# Altium PCB PCB-Lift_2022-01-25.pcbdoc (part 1 of 2)
Units mil, origin at the board's own origin, x right, y up, seen from the top; angles counter-clockwise.
Board outline 4947.01 x 4952.29 mil, 2 copper layers (Top Layer, Bottom Layer); 137 components, 143 nets, 538 pads, 141 vias.
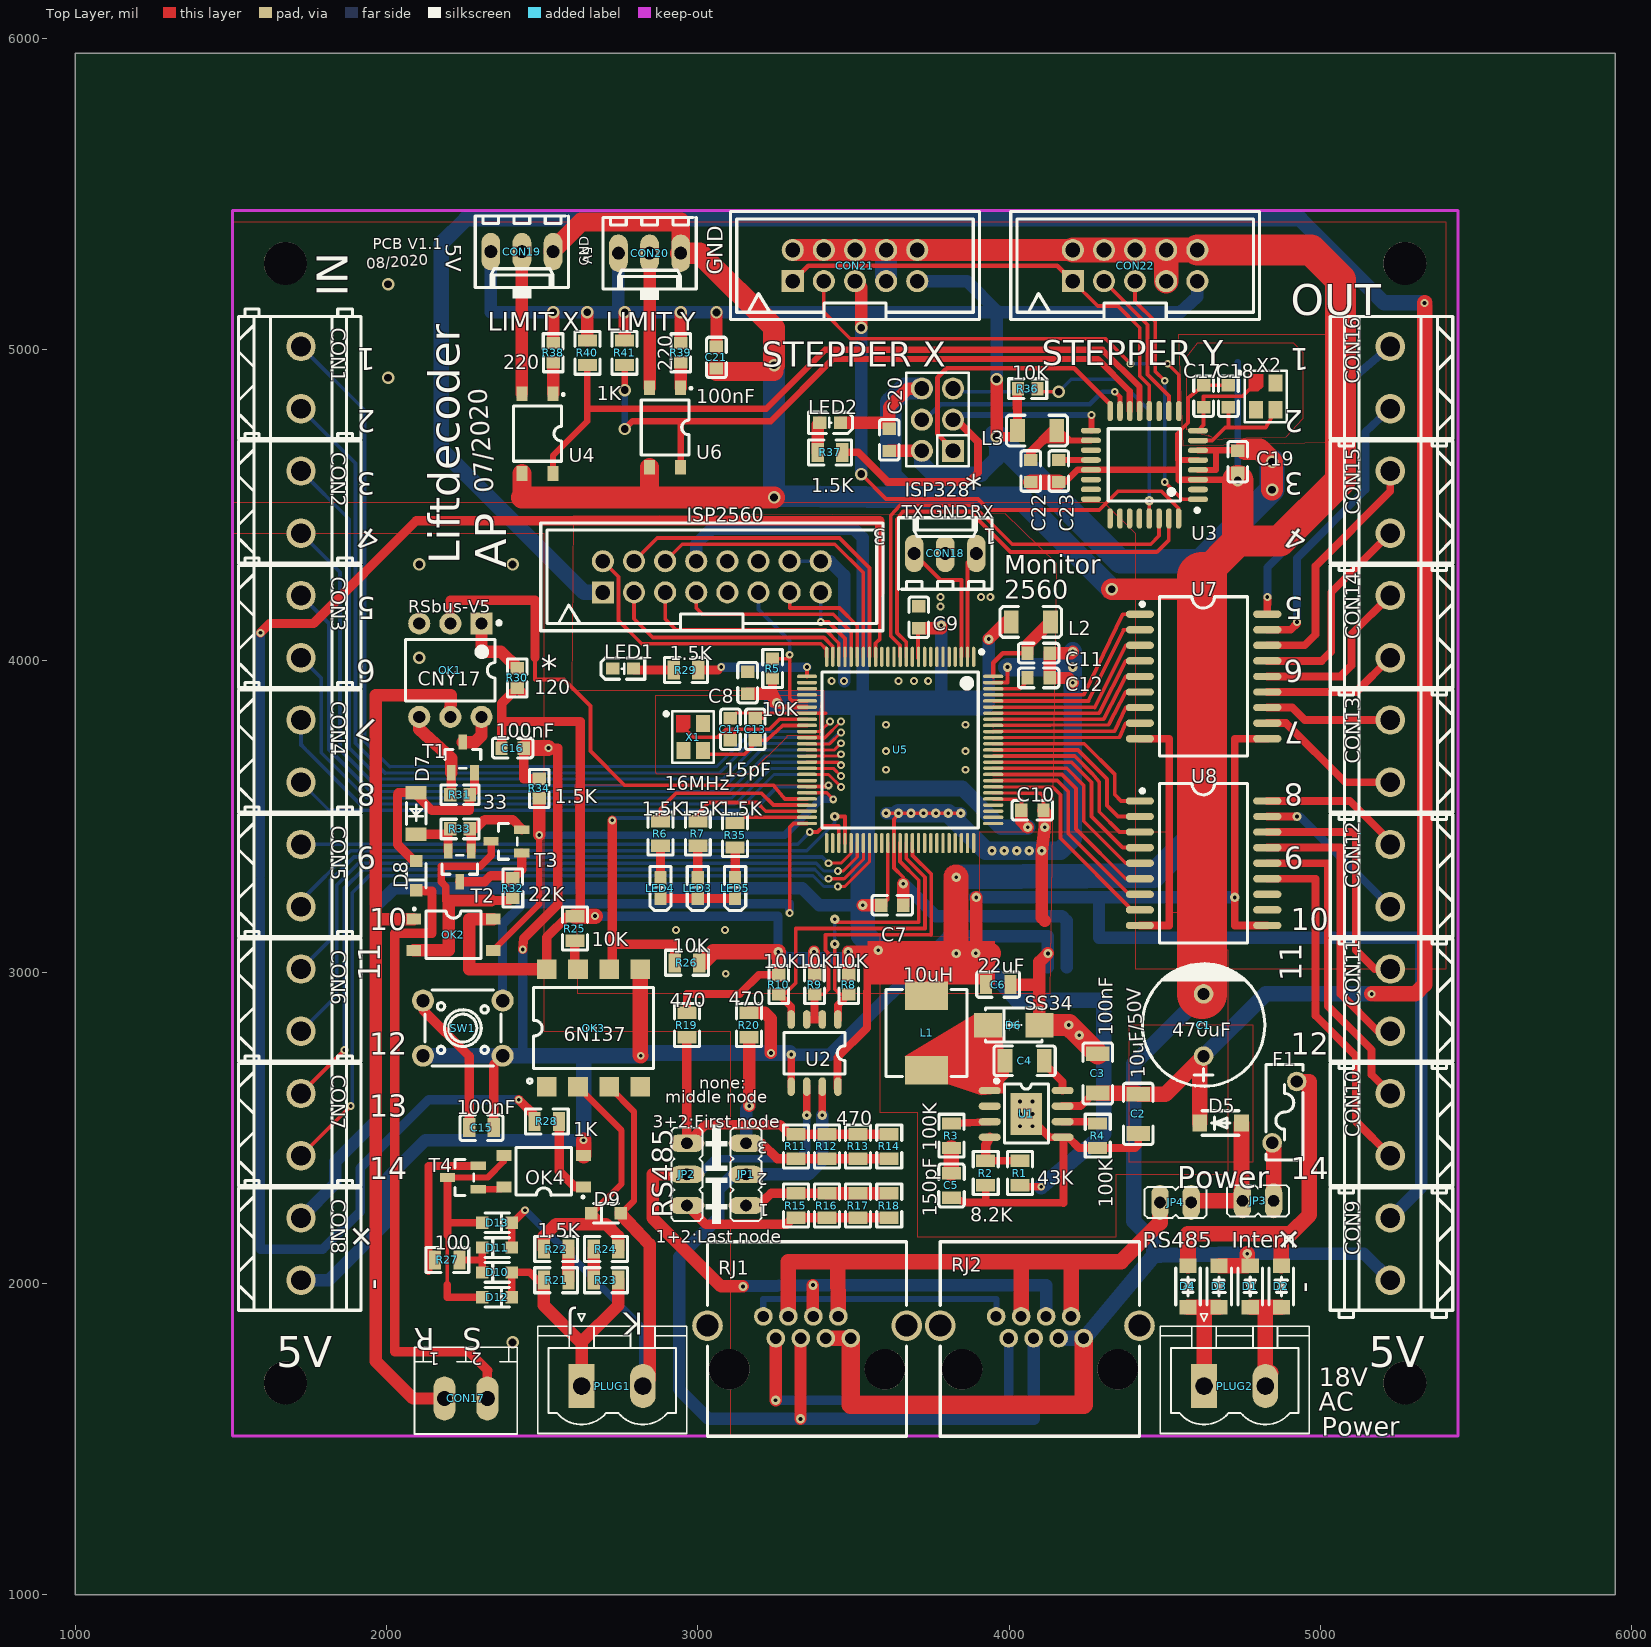
[diagram p0: Top Layer view]
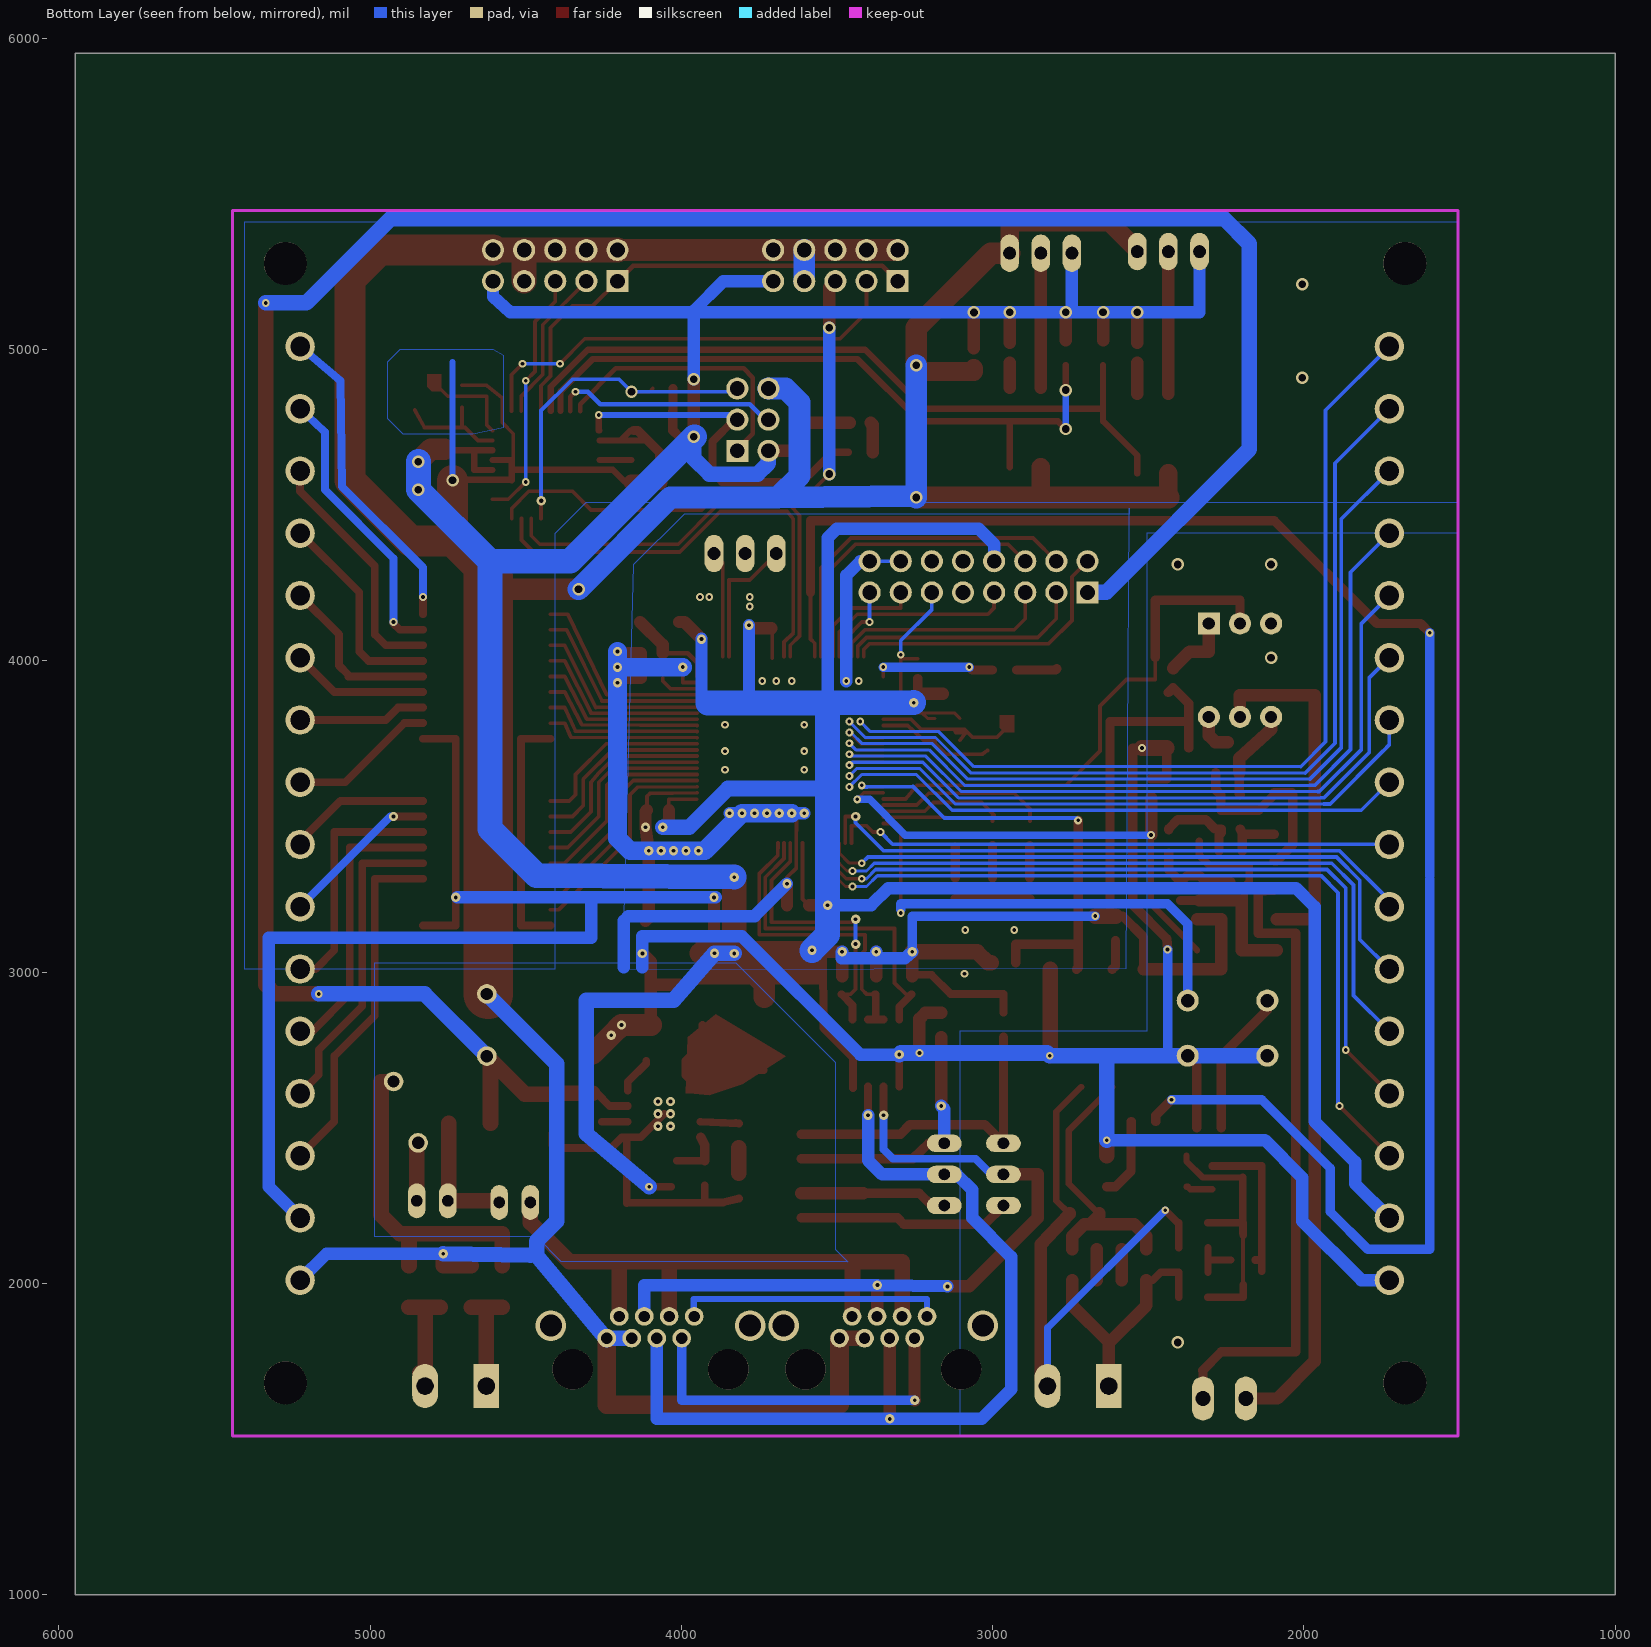
[diagram p1: Bottom Layer view, seen from below]

## Layer stack, top to bottom
Top Layer: signal copper (thickness not stored)
Dielectric: dielectric 12.6, FR-4, Dk 4.8
Bottom Layer: signal copper (thickness not stored)

## Board outline
5947.01,1000 1000,1000 1000,5952.29 5947.01,5952.29

## Components (designator, comment, footprint, x,y, rotation, side; value= is the part's Value field where it differs from the comment)
C1 "470uF" CAP-TH_BD10.0-P5.00-D1.0-FD 4625,2830.28 r90 top
C2 "10uF/50V" C1206 4414.99,2544.68 r90 top
C3 "100nF" C1206 4285,2674.65 r90 top
C4 "100nF" C1206 4050,2715.28 r0 top
C5 "150pF" C0805 3815,2314.65 r90 top
C6 "22uF" C0805 3965,2960.28 r180 top
C7 "100nF" C0603 3625,3215.28 r180 top
C8 "100nF" C0603 3160,3930.28 r270 top
C9 "100nF" C0603 3710,4140.28 r270 top
C10 "100nF" C0603 4075,3520.28 r180 top
C11 "100nF" C0603 4095,4025.28 r180 top
C12 "100nF" C0603 4095,3945.28 r180 top
C13 "15pF" C0603 3185,3780.28 r270 top
C14 "15pF" C0603 3105,3780.28 r270 top
C15 "100nF" C0805 2305,2500.28 r180 top
C16 "100nF" C0603 2405,3720.28 r0 top
C17 "15pF" C0603 4625,4850.28 r270 top
C18 "15pF" C0603 4705,4850.28 r270 top
C19 "100nF" C0603 4735,4640.28 r90 top
C20 "100nF" C0603 3615,4710.28 r270 top
C21 "100nF" C0603 3060,4975.28 r90 top
C22 "100nF" C0603 4070,4610.28 r90 top
C23 "100nF" C0603 4160,4610.28 r90 top
CON1 "DB128L-5.08-2P" CONN-TH_2P-P5.08_DB128L-5.08-2P 1725,4910.28 r270 top
CON2 "DB128L-5.08-2P" CONN-TH_2P-P5.08_DB128L-5.08-2P 1725,4510.28 r270 top
CON3 "DB128L-5.08-2P" CONN-TH_2P-P5.08_DB128L-5.08-2P 1725,4110.28 r270 top
CON4 "DB128L-5.08-2P" CONN-TH_2P-P5.08_DB128L-5.08-2P 1725,3710.28 r270 top
CON5 "DB128L-5.08-2P" CONN-TH_2P-P5.08_DB128L-5.08-2P 1725,3310.28 r270 top
CON6 "DB128L-5.08-2P" CONN-TH_2P-P5.08_DB128L-5.08-2P 1725,2910.28 r270 top
CON7 "DB128L-5.08-2P" CONN-TH_2P-P5.08_DB128L-5.08-2P 1725,2510.28 r270 top
CON8 "DB128L-5.08-2P" CONN-TH_2P-P5.08_DB128L-5.08-2P 1725,2110.28 r270 top
CON9 "DB128L-5.08-2P" CONN-TH_2P-P5.08_DB128L-5.08-2P 5225,2110.28 r90 top
CON10 "DB128L-5.08-2P" CONN-TH_2P-P5.08_DB128L-5.08-2P 5225,2510.28 r90 top
CON11 "DB128L-5.08-2P" CONN-TH_2P-P5.08_DB128L-5.08-2P 5225,2910.28 r90 top
CON12 "DB128L-5.08-2P" CONN-TH_2P-P5.08_DB128L-5.08-2P 5225,3310.28 r90 top
CON13 "DB128L-5.08-2P" CONN-TH_2P-P5.08_DB128L-5.08-2P 5225,3710.28 r90 top
CON14 "DB128L-5.08-2P" CONN-TH_2P-P5.08_DB128L-5.08-2P 5225,4110.28 r90 top
CON15 "DB128L-5.08-2P" CONN-TH_2P-P5.08_DB128L-5.08-2P 5225,4510.28 r90 top
CON16 "DB128L-5.08-2P" CONN-TH_2P-P5.08_DB128L-5.08-2P 5225,4910.28 r90 top
CON17 "RS-bus connector" STL-1550-2-V 2255,1630.28 r0 top
CON18 "2510S-3P" MOLEX-3P 3795,4345.28 r0 top
CON19 "2510S-3P" MOLEX-3P 2435,5315.28 r180 top
CON20 "2510S-3P" MOLEX-3P 2845,5310.28 r180 top
CON21 "300S-10P" IDC-TH_300S-10P 3505,5270.28 r0 top
CON22 "300S-10P" IDC-TH_300S-10P 4405,5270.28 r0 top
D1 "4007" SOD-123F_L2.8-W1.8-LS3.7-RD 4775,1990.28 r90 top
D2 "4007" SOD-123F_L2.8-W1.8-LS3.7-RD 4875,1990.28 r270 top
D3 "4007" SOD-123F_L2.8-W1.8-LS3.7-RD 4675,1990.28 r90 top
D4 "4007" SOD-123F_L2.8-W1.8-LS3.7-RD 4575,1990.28 r270 top
D5 "4007" SOD-123F_L2.8-W1.8-LS3.7-RD 4680,2515.28 r0 top
D6 "SS34" DO-214AC_SS34_PAD_DISTANCE_UPDATED 4015,2830.28 r0 top
D7 "ZMM5V6" LL-34_L3.5-W1.5-RD 2095,3510.28 r90 top
D8 "1N4148" SOD-323_L1.8-W1.3-LS2.5-RD 2095,3310.28 r90 top
D9 "1N4148" SOD-323_L1.8-W1.3-LS2.5-RD 2705,2225.28 r0 top
D10 "1N4148" SOD-323_L1.8-W1.3-LS2.5-RD 2355,2035.28 r0 top
D11 "1N4148" SOD-323_L1.8-W1.3-LS2.5-RD 2355,2115.28 r0 top
D12 "1N4148" SOD-323_L1.8-W1.3-LS2.5-RD 2355,1955.28 r180 top
D13 "1N4148" SOD-323_L1.8-W1.3-LS2.5-RD 2355,2195.28 r180 top
F1 "Resettable fuse" FUSE-TH_L7.8-W3.0-P5.10-D0.5-S2.00 4885,2550.28 r90 top
ISP328 "2560" HDR-TH_6P-P2.54-V-R2-C3-S2.54 3770,4775.28 r90 top
ISP2560 "300S-16P" IDC-TH_300S-16P 3045,4270.28 r0 top
JP1 "JP2E" JP2 3155,2350.28 r90 top
JP2 "JP2E" JP2 2965,2350.28 r90 top
JP3 "JP1E" JP1 4800,2265.28 r90 top
JP4 "JP1E" JP1 4535,2260.28 r90 top
L1 "10uH" IND-SMD_L7.1-W6.6 3735,2804.65 r90 top
L2 "10uH" L1206 4070,4125.28 r180 top
L3 "10uH" L1206 4090,4740.28 r180 top
LED1 "KT-0603R" LED0603-R-RD 2760,3975.28 r0 top
LED2 "KT-0603R" LED0603-R-RD 3425,4765.28 r180 top
LED3 "19-217/GHC-YR1S2/3T" LED0603-R-RD 3000,3270.28 r90 top
LED4 "19-217/BHC-ZL1M2RY/3T" LED0603-R-RD 2880,3270.28 r90 top
LED5 "19-213/Y2C-CQ2R2L/3T(CY)" LED0603-R-RD 3120,3270.28 r90 top
OK1 "CNY17" DIP-6_L7.3-W6.5-P2.54-LS7.6-BL 2205,3970.28 r180 top
OK2 "EL357N(C)" SOP-4_L3.9-W4.4-P2.54-LS7.0-TL 2215,3120.28 r0 top
OK3 "6N137" SMD-8_L9.8-W6.6-P2.54-LS10.3-BL 2665,2820.28 r0 top
OK4 "EL357N(C)" SOP-4_L3.9-W4.4-P2.54-LS7.0-TL 2505,2360.28 r180 top
PLUG1 "CON_2P_5MM-VERTICAL" "PHOENIX MSTBVA 2,5/2-G" 2725,1670.28 r0 top
PLUG2 "CON_2P_5MM-VERTICAL" "PHOENIX MSTBVA 2,5/2-G" 4725,1670.28 r0 top
R1 "43K" R0805 4035,2354.65 r270 top
R2 "8.2K" R0805 3925,2354.65 r90 top
R3 "100K" R0805 3815,2474.65 r90 top
R4 "100K" R0805 4285,2474.65 r270 top
R5 "10K" R0603 3240,3975.28 r270 top
R6 "1.5K" R0805 2880,3445.28 r90 top
R7 "1.5K" R0805 3000,3445.28 r90 top
R8 "10K" R0603 3485,2960.28 r90 top
R9 "10K" R0603 3375,2960.28 r90 top
R10 "10K" R0603 3260,2960.28 r90 top
R11 "470" R0805 3315,2440.28 r90 top
R12 "470" R0805 3415,2440.28 r90 top
R13 "470" R0805 3515,2440.28 r90 top
R14 "470" R0805 3615,2440.28 r90 top
R15 "470" R0805 3315,2250.28 r270 top
R16 "470" R0805 3415,2250.28 r270 top
R17 "470" R0805 3515,2250.28 r270 top
R18 "470" R0805 3615,2250.28 r270 top
R19 "470" R0805 2965,2830.28 r90 top
R20 "470" R0805 3165,2830.28 r270 top
R21 "1.5K" R0805 2545,2010.28 r0 top
R22 "1.5K" R0805 2545,2110.28 r180 top
R23 "1.5K" R0805 2705,2010.28 r180 top
R24 "1.5K" R0805 2705,2110.28 r0 top
R25 "10K" R0805 2605,3140.28 r90 top
R26 "10K" R0805 2965,3030.28 r0 top
R27 "100" R0805 2195,2075.28 r180 top
R28 "1K" R0805 2515,2520.28 r180 top
R29 "1.5K" R0805 2961.69,3970.91 r0 top
R30 "120" R0603 2420,3945.28 r90 top
R31 "33" R0603 2235.8,3570.28 r0 top
R32 "22K" R0603 2405.8,3270.28 r270 top
R33 "220" R0603 2235.8,3460.28 r180 top
R34 "1.5K" R0603 2490.8,3590.29 r90 top
R35 "1.5K" R0805 3120,3440.28 r90 top
R36 "10K" R0603 4060,4875.28 r180 top
R37 "1.5K" R0805 3425,4670.28 r0 top
R38 "220" R0603 2535,4990.28 r270 top
R39 "220" R0603 2945,4990.28 r270 top
R40 "1K" R0805 2645,4990.28 r270 top
R41 "1K" R0805 2765,4990.28 r270 top
RJ1 "R-RJ45R08P-B000" RJ45-TH_R-RJ45R08P-B000 3351.06,1858.98 r0 top
RJ2 "R-RJ45R08P-B000" RJ45-TH_R-RJ45R08P-B000 4099.1,1858.98 r0 top
SW1 "B3F-1000" KEY-TH_4P-L6.2-W6.2-P4.50-LS6.5 2245,2820.28 r180 top
T1 "MMBT5551" SOT-23-3_L2.9-W1.3-P1.90-LS2.4-BR 2245,3690.28 r270 top
T2 "MMBT5551" SOT-23-3_L2.9-W1.3-P1.90-LS2.4-BR 2235,3340.28 r90 top
T3 "MMBT5551" SOT-23-3_L2.9-W1.3-P1.90-LS2.4-BR 2385,3420.28 r0 top
T4 "MMBT5401" SOT-23-3_L2.9-W1.3-P1.90-LS2.4-BR 2245,2340.28 r0 top
U1 "MP1584" SOIC-8_L5.0-W4.0-P1.27-LS6.0-BL-EP 4055,2544.65 r270 top
U2 "SP485EEN-L/TR" SOIC-8_L5.0-W4.0-P1.27-LS6.0-BL 3375,2740.28 r180 top
U3 "ATMEGA328P-AU" TQFP-32_L7.0-W7.0-P0.80-LS9.0-BL 4435,4630.28 r90 top
U4 "EL357N(C)(TA)-G" SOP-4_L3.9-W4.4-P2.54-LS7.0-TL 2485,4730.28 r270 top
U5 "ATMEGA2560-16AU" TQFP-100_L14.0-W14.0-P0.50-LS16.0-BL 3650.04,3714.06 r180 top
U6 "EL357N(C)(TA)-G" SOP-4_L3.9-W4.4-P2.54-LS7.0-TL 2895,4750.28 r270 top
U7 "ULN2803ADWR" SOIC-18_L13.8-W7.5-P1.27-LS10.3-BL 4625.05,3950.23 r270 top
U8 "ULN2803ADWR" SOIC-18_L13.8-W7.5-P1.27-LS10.3-BL 4625.05,3350.23 r270 top
X1 "16MHz" OSC-SMD_4P-L3.2-W2.5-BL 2985,3755.28 r270 top
X2 "16MHz" OSC-SMD_4P-L3.2-W2.5-BL 4825,4850.28 r270 top

## Footprints (in the part's own frame and the unit in brackets; to place one, negate y for a bottom-side part, rotate by r counter-clockwise, add the part's x,y. Pads: shape width x height; smd on the part's side, far side on the other; paste and mask are expansions set on the pad)
C0603 [mm]
  rect 1x1.1 smd: 1(-0.9,0) 2(0.9,0)
  silkscreen extent -1.65,-0.8 1.65,0.8
C0805 [mm]
  rect 1x1.55 smd: 1(-1,0) 2(1,0)
  silkscreen extent -1.75,-1.04 1.75,1.04
C1206 [mm]
  rect 1.2x1.9 smd: 1(-1.6,0) 2(1.6,0)
  silkscreen extent -2.5,-1.2 2.5,1.2
CAP-TH_BD10.0-P5.00-D1.0-FD [mm]
  round 1.6 hole 1: 1(-2.54,0) 2(2.54,0)
  silkscreen extent -5,-5 5.08,4.99
CONN-TH_2P-P5.08_DB128L-5.08-2P [mm]
  round 2.4 hole 1.6: 1(-2.54,0) 2(2.54,0)
  silkscreen extent -5.59,-5.1 4.99,4.9
DIP-6_L7.3-W6.5-P2.54-LS7.6-BL [mm]
  rect 1.8x1.8 hole 1: 1(-2.54,-3.81)
  round 1.8 hole 1: 2(0,-3.81) 3(2.54,-3.81) 4(2.54,3.81) 5(0,3.81) 6(-2.54,3.81)
  silkscreen extent -4.11,-4.01 3.65,2.5
DO-214AC_SS34_PAD_DISTANCE_UPDATED [mm]
  rect 2.3x2 smd: 1(-2.1,0) 2(2.1,0)
  silkscreen extent -2.3,-1.4 2.3,1.4
FUSE-TH_L7.8-W3.0-P5.10-D0.5-S2.00 [mm]
  round 1.6 hole 1: 1(-2.5,1) 2(2.5,-1)
  silkscreen extent -3.9,-1.5 3.9,1.5
HDR-TH_6P-P2.54-V-R2-C3-S2.54 [mm]
  rect 1.8x1.8 hole 1.2: 1(-2.54,-1.27)
  round 1.8 hole 1.2: 2(-2.54,1.27) 3(0,-1.27) 4(0,1.27) 5(2.54,-1.27) 6(2.54,1.27)
  silkscreen extent -3.81,-2.54 3.81,2.54
IDC-TH_300S-10P [mm]
  rect 1.8x1.8 hole 1.2: 1(-5.08,-1.27)
  round 1.8 hole 1.2: 2(-5.08,1.27) 3(-2.54,-1.27) 4(-2.54,1.27) 5(0,-1.27) 6(0,1.27) 7(2.54,-1.27) 8(2.54,1.27) 9(5.08,-1.27) 10(5.08,1.27)
  silkscreen extent -10.15,-4.4 10.15,4.4
IDC-TH_300S-16P [mm]
  rect 1.8x1.8 hole 1.2: 1(-8.89,-1.27)
  round 1.8 hole 1.2: 2(-8.89,1.27) 3(-6.35,-1.27) 4(-6.35,1.27) 5(-3.81,-1.27) 6(-3.81,1.27) 7(-1.27,-1.27) 8(-1.27,1.27) 9(1.27,-1.27) 10(1.27,1.27) 11(3.81,-1.27) 12(3.81,1.27) 13(6.35,-1.27) 14(6.35,1.27) 15(8.89,-1.27) 16(8.89,1.27)
  silkscreen extent -13.96,-4.4 13.96,4.4
IND-SMD_L7.1-W6.6 [mm]
  rect 2.35x3.5 smd: 1(-3.035,0) 2(3.035,0)
  silkscreen extent -3.55,-3.3 3.55,3.3
JP1 [mil]
  oval 112x56 hole 36 slot 36.2 at 0 deg: 1(0,-50) 2(0,50)
  silkscreen extent -50,-100 50,100
JP2 [mil]
  oval 56x112 hole 36 slot 36.2 at 90 deg: 1(-100,0) 2(0,0) 3(100,0)
  silkscreen extent -150,-50 150,50
KEY-TH_4P-L6.2-W6.2-P4.50-LS6.5 [mm]
  round 1.8 hole 1.1: 1(-3.251,2.25) 2(3.251,2.25) 3(-3.251,-2.25) 4(3.251,-2.25)
  silkscreen extent -3.1,-3.1 3.1,3.1
L1206 [mm]
  rect 1.2x1.9 smd: 1(-1.6,0) 2(1.6,0)
  silkscreen extent -2.5,-1.25 2.5,1.25
LED0603-R-RD [mil]
  rect 43x39 smd: 1(33.5,0) 2(-33.5,0)
  silkscreen extent -72,-34 70,34
LL-34_L3.5-W1.5-RD [mm]
  rect 1.1x1.7 smd: 1(-1.7,0) 2(1.7,0)
  silkscreen extent -0.9,-0.8 0.9,0.8
MOLEX-3P [mil]
  oval 60x120 hole 40 slot 40.2 at 90 deg: 1(100,0) 2(0,0) 3(-100,0)
  silkscreen extent -150,-115 150,115
OSC-SMD_4P-L3.2-W2.5-BL [mm]
  round 0 smd: 1(-1.1,-0.8)
  rect 1.4x1.15 smd: 2(1.1,-0.8) 3(1.1,0.8) 4(-1.1,0.8)
  Top Layer region: -1.8,-0.225 -0.762,-0.225 -0.4,-0.604 -0.4,-1.375 -1.8,-1.375
  silkscreen extent -2.1,-2.35 2.1,1.7
"PHOENIX MSTBVA 2,5/2-G" [mm]
  rect 2.1x3.6 hole 1.4 slot 1.405 at 90 deg: 1(-2.5,0)
  oval 2.1x3.6 hole 1.4 slot 1.405 at 90 deg: 2(2.501,0)
  silkscreen extent -6.08,-3.88 6.08,5.9
R0603 [mm]
  rect 1x1.1 smd: 1(-0.8,0) 2(0.8,0)
  silkscreen extent -1.55,-0.8 1.55,0.81
R0805 [mm]
  rect 1x1.55 smd: 1(-1,0) 2(1,0)
  silkscreen extent -1.75,-1.02 1.75,1.02
RJ45-TH_R-RJ45R08P-B000 [mm]
  round 1.524 hole 0.914: 1(3.57,-0.89) 2(2.55,0.89) 3(1.53,-0.89) 4(0.51,0.89) 5(-0.51,-0.89) 6(-1.53,0.89) 7(-2.55,-0.89) 8(-3.57,0.89)
  round 2.5 hole 1.8: 9(-8.13,0.13) 10(8.13,0.13)
  round 3.3 hole 3.3 unplated: ""(-6.35,-3.43) ""(6.35,-3.43)
  silkscreen extent -8.13,-8.89 8.13,6.98
SMD-8_L9.8-W6.6-P2.54-LS10.3-BL [mil]
  rect 62.99x63 smd: 1(-150,-188.97) 2(-50,-188.97) 3(50,-188.97) 4(150,-188.97) 5(150,188.98) 6(50,188.98) 7(-50,188.98) 8(-150,188.98)
  silkscreen extent -212,-177 193,130
SOD-123F_L2.8-W1.8-LS3.7-RD [mm]
  rect 1.2x1.4 smd: 1(-1.7,0) 2(1.7,0)
  silkscreen extent -1.5,-1 1.5,1
SOD-323_L1.8-W1.3-LS2.5-RD [mm]
  rect 1x1 smd: 1(-1.2,0) 2(1.2,0)
  silkscreen extent -1,-0.8 1,0.8
SOIC-8_L5.0-W4.0-P1.27-LS6.0-BL [mm]
  oval 0.6x1.52 smd: 1(-1.905,-2.74) 2(-0.635,-2.74) 3(0.635,-2.74) 4(1.905,-2.74) 5(1.905,2.74) 6(0.635,2.74) 7(-0.635,2.74) 8(-1.905,2.74)
  silkscreen extent -2.49,-1.67 2.5,1.7
SOIC-8_L5.0-W4.0-P1.27-LS6.0-BL-EP [mm]
  oval 0.6x1.8 smd: 1(-1.905,-2.972) 2(-0.635,-2.972) 3(0.635,-2.972) 4(1.905,-2.972) 5(1.905,2.972) 6(0.635,2.972) 7(-0.635,2.972) 8(-1.905,2.972)
  rect 3.45x2.56 smd: 9(0,0)
  silkscreen extent -2.84,-2.56 2.39,1.83
SOIC-18_L13.8-W7.5-P1.27-LS10.3-BL [mm]
  oval 0.6x2.3 smd: 1(-5.08,-5.2) 2(-3.81,-5.2) 3(-2.54,-5.2) 4(-1.27,-5.2) 5(0,-5.2) 6(1.27,-5.2) 7(2.54,-5.2) 8(3.81,-5.2) 9(5.08,-5.2) 10(5.08,5.2) 11(3.81,5.2) 12(2.54,5.2) 13(1.27,5.2) 14(0,5.2) 15(-1.27,5.2) 16(-2.54,5.2) 17(-3.81,5.2) 18(-5.08,5.2)
  silkscreen extent -6.5,-5.15 6.5,3.6
SOP-4_L3.9-W4.4-P2.54-LS7.0-TL [mm]
  rect 1.199x0.9 smd: 1(-3.25,1.27) 2(-3.25,-1.27) 3(3.25,-1.27) 4(3.25,1.27)
  silkscreen extent -3.28,-1.95 2.25,2.18
SOT-23-3_L2.9-W1.3-P1.90-LS2.4-BR [mm]
  rect 1.25x0.7 smd: 1(1.25,-0.95) 2(1.25,0.95) 3(-1.25,0)
  silkscreen extent -0.65,-1.46 0.9,1.46
STL-1550-2-V [mil]
  oval 70.87x141.73 hole 47.24 slot 47.44 at 90 deg: 1(-68.9,0) 2(68.9,0)
  silkscreen extent -165,-114 165,165
TQFP-32_L7.0-W7.0-P0.80-LS9.0-BL [mm]
  oval 0.45x1.65 smd: 1(-2.817,-4.369) 2(-2.017,-4.369) 3(-1.217,-4.369) 4(-0.417,-4.369) 5(0.381,-4.369) 6(1.181,-4.369) 7(1.981,-4.369) 8(2.781,-4.369) 17(2.791,4.369) 18(1.991,4.369) 19(1.191,4.369) 20(0.391,4.369) 21(-0.406,4.369) 22(-1.207,4.369) 23(-2.007,4.369) 24(-2.807,4.369)
  oval 1.65x0.45 smd: 9(4.381,-2.804) 10(4.381,-2.004) 11(4.381,-1.204) 12(4.381,-0.404) 13(4.381,0.394) 14(4.381,1.194) 15(4.381,1.994) 16(4.381,2.794) 25(-4.381,2.804) 26(-4.381,2.004) 27(-4.381,1.204) 28(-4.381,0.404) 29(-4.381,-0.394) 30(-4.381,-1.194) 31(-4.381,-1.994) 32(-4.381,-2.794)
  silkscreen extent -3.86,-4.45 2.94,2.95
TQFP-100_L14.0-W14.0-P0.50-LS16.0-BL [mm]
  oval 0.28x1.65 smd: 1(-6,-7.6) 2(-5.5,-7.6) 3(-5,-7.6) 4(-4.5,-7.6) 5(-4,-7.6) 6(-3.5,-7.6) 7(-3,-7.6) 8(-2.5,-7.6) 9(-2,-7.6) 10(-1.5,-7.6) 11(-1,-7.6) 12(-0.5,-7.6) 13(0,-7.6) 14(0.5,-7.6) 15(1,-7.6) 16(1.5,-7.6) 17(2,-7.6) 18(2.5,-7.6) 19(3,-7.6) 20(3.5,-7.6) 21(4,-7.6) 22(4.5,-7.6) 23(5,-7.6) 24(5.5,-7.6) 25(6,-7.6) 51(6,7.6) 52(5.5,7.6) 53(5,7.6) 54(4.5,7.6) 55(4,7.6) 56(3.5,7.6) 57(3,7.6) 58(2.5,7.6) 59(2,7.6) 60(1.5,7.6) 61(1,7.6) 62(0.5,7.6) 63(0,7.6) 64(-0.5,7.6) 65(-1,7.6) 66(-1.5,7.6) 67(-2,7.6) 68(-2.5,7.6) 69(-3,7.6) 70(-3.5,7.6) 71(-4,7.6) 72(-4.5,7.6) 73(-5,7.6) 74(-5.5,7.6) 75(-6,7.6)
  oval 1.65x0.28 smd: 26(7.6,-6) 27(7.6,-5.5) 28(7.6,-5) 29(7.6,-4.5) 30(7.6,-4) 31(7.6,-3.5) 32(7.6,-3) 33(7.6,-2.5) 34(7.6,-2) 35(7.6,-1.5) 36(7.6,-1) 37(7.6,-0.5) 38(7.6,0) 39(7.6,0.5) 40(7.6,1) 41(7.6,1.5) 42(7.6,2) 43(7.6,2.5) 44(7.6,3) 45(7.6,3.5) 46(7.6,4) 47(7.6,4.5) 48(7.6,5) 49(7.6,5.5) 50(7.6,6) 76(-7.6,6) 77(-7.6,5.5) 78(-7.6,5) 79(-7.6,4.5) 80(-7.6,4) 81(-7.6,3.5) 82(-7.6,3) 83(-7.6,2.5) 84(-7.6,2) 85(-7.6,1.5) 86(-7.6,1) 87(-7.6,0.5) 88(-7.6,0) 89(-7.6,-0.5) 90(-7.6,-1) 91(-7.6,-1.5) 92(-7.6,-2) 93(-7.6,-2.5) 94(-7.6,-3) 95(-7.6,-3.5) 96(-7.6,-4) 97(-7.6,-4.5) 98(-7.6,-5) 99(-7.6,-5.5) 100(-7.6,-6)
  silkscreen extent -6.8,-8.15 6.37,6.37

## Free pads (board coordinates)
  round 137.8 hole 137.8 unplated: ""(1675,1680.28) ""(1675,5277.33) ""(5272.05,1680.28) ""(5272.05,5277.33)

## Via types
v1: diameter 25, hole 12, Top Layer to Bottom Layer, tented both sides, 62 vias
v2: diameter 30, hole 12, Top Layer to Bottom Layer, tented both sides, 54 vias
v3: diameter 40, hole 25, Top Layer to Bottom Layer, tented both sides, 24 vias
v4: diameter 30, hole 15, Top Layer to Bottom Layer, tented both sides, 1 vias

## Nets (pads, with @x,y where several pads share a name; then routed paths per layer and width w, separated by ;. In a path a pad name is that pad's centre, name@x,y a point inside that pad or via, vN(x,y) a via of type N, cw(c..) or ccw(c..) an arc to the next point about the centre after c; other vN are vias at no path point)
485RE/DE: R9.1 U2.2 U2.3 U5.65 | length 1024.6
  Top Layer w12: R9.1@3375,2928.79 3403.5,2928.78 3420,2945.28 3420,3060.28 3410,3070.28 3410,3120.28 3750,3120.28 3750,3315.28 3690,3375.28 U5.65@3689.41,3414.85
  Top Layer w25: U2.3@3350,2848.16 U2.2@3400,2848.16 ; 3375,2848.15 R9.1@3375,2928.79 R9.1@3378.51,2928.79
485RXD: R8.1 U2.1 U5.63 | length 931.4
  Top Layer w12: v2(3440,3090.28) 3440,2945.28 3456.49,2928.8 R8.1@3485,2928.79 ; v2(3440,3170.28) 3440,3160.28 3710,3160.28 3710,3295.28 3650,3355.28 U5.63@3650.04,3414.85
  Top Layer w25: U2.1@3450,2848.16 3450,2893.79 R8.1@3485,2928.79
  Bottom Layer w12: v2(3440,3090.28) v2(3440,3170.28)
485TXD: R10.1 U2.4 U5.64 | length 1056.9
  Top Layer w12: R10.1@3260,2928.79 3278.51,2928.79 3315,2965.28 3315,3140.28 3730,3140.28 3730,3305.28 3669.7,3365.58 U5.64@3669.72,3414.85
  Top Layer w25: R10.1@3260,2928.79 3300,2888.79 U2.4@3300,2848.16
+5V: C6.2 C7.2 C8.2 C9.2 C10.2 C16.1 C19.2 C20.2 C21.2 CON8.1 CON9.2 CON19.1 CON20.1 CON21.9 CON22.9 ISP328.2 ISP2560.8 L1.2 L2.2 L3.2 OK2.4 OK3.8 R1.2 R5.2 R8.2 R9.2 R10.2 R19.2 R25.2 R26.2 R30.1 R36.2 R38.1 R39.1 R40.1 R41.1 U2.8 U3.4 U3.6 U5.10 U5.31 U5.61 U5.80 U7.10 U8.10 | length 25759.3
  Top Layer w12: C7.2@3589.57,3215.28 3590.67,3215.28 3610.67,3235.28 U5.61@3610.67,3414.85 ; U5.10@3707.49,4008.89 3707.49,4102.33 C9.2@3710,4104.85 ; U5.80@3950,3555.28 4040,3555.28 C10.2@4039.57,3520.28
  Top Layer w15: v2(3253.39,3865.89) 3267.41,3851.87 U5.31@3350.83,3851.86
  Top Layer w20: U3.4@4607,4613.88 4665,4613.88 4665,4675.72 ; U3.6@4607,4676.78 4735,4676.78 C19.2@4735,4675.72
  Top Layer w25: R19.2@2965,2869.65 2965,2930.28 3135,2930.28 3196.5,2991.78 R10.2@3260,2991.78 ; U2.8@3448.39,2628.02 3448.39,2725.89 3543.39,2820.89 3544.56,3065.89 ; R1.2@4033.39,2310.89 v1(4103.39,2310.89) ; U8.10@4829.7,3150.28 4725,3150.28 v2(4725,3240.28) 4725,3750.28 U7.10@4829.72,3750.28
  Top Layer w30: C16.1@2369.57,3720.28 2369.6,3796.49 2369.6,3863.38 R30.1@2420,3913.79 R30.1@2435,3898.78 ; 2369.6,3805.28 2622.5,3805.28 2622.5,3179.68 R25.2@2605,3179.65 2581.9,3179.68 2515,3112.78 OK3.8@2515,3009.26 ; v2@3240,3865.89 R5.2@3240,3943.79 ; v3(3960,4720.28) 4007,4720.28 L3.2@4027.01,4740.28 R36.2@4026.5,4875.28
  Top Layer w39.37: C8.2@3160,3894.88 3240,3894.88 v2(3253.39,3865.89) ; C9.2@3710,4104.85 3782.52,4104.84 v2@3782.52,4110.58 ; v2(3935,4070.28) 3989.99,4125.27 L2.2@4007.01,4125.28
  Top Layer w40: OK2.4@2342.95,3170.28 2265,3170.28 2265,3010.28 2266.02,3009.26 OK3.8@2515,3009.26 ; R38.1@2535,5021.78 v3(2535,5120.28) ; R40.1@2645,5029.65 v3(2645,5120.28) ; R41.1@2765,5030.28 v3(2765,5120.28) ; R39.1@2945,5021.78 v3(2945,5120.28) ; C21.2@3060,5005.28 v3(3060,5119.84) ; R10.2@3258.39,2987.39 v2(3258.39,3065.89) ; R9.2@3373.39,2987.39 v2(3373.39,3065.89) ; R8.2@3483.38,2987.39 v2(3483.39,3065.89) 3830,3065.89 v2(3830,3060.28) ; v2(3530,3215.28) C7.2@3589.57,3215.28 ; C20.2@3615,4674.85 3615.44,4675.28 ISP328.2@3720,4675.28 ; v2(3893.39,3060.89) 3895,3062.51 v2(3895,3240.28) ; v3(3960,4720.28) v3(3960,4905.28) ; C10.2@4039.57,3520.28 4039.56,3485.72 v2(4060,3465.28)
  Top Layer w50: R25.2@2605,3179.65 2669.37,3179.65 v1(2670,3180.28) ; R26.2@3004.37,3030.28 3015,3030.28 3050,3065.28 v2@3258.39,3065.28
  Top Layer w70: L1.2@3733.38,2919.75 3733.38,2963.67 v2(3830,3060.28) 3830.61,3060.89 v2(3893.39,3060.89) 3938.39,3060.89 ; 4760,4680.28 4805,4680.28 v3(4845,4640.28) 4845,4592.14 v3(4845,4550.28)
  Top Layer w80: v2@3825,3060.28 v2(3830,3060.28) v2(3830,3305.28)
  Bottom Layer w30: v1(2670,3180.28) 3257.9,3180.28 v2@3257.9,3077.28
  Bottom Layer w39.37: 3782.5,3865.28 v2(3782.52,4114.51) ; 3935,3869.09 v2@3935,4071.48
  Bottom Layer w40: CON8.1@1725,2210.28 1835,2320.28 1835,2390.28 1965,2520.28 1965,3210.28 2025,3270.28 3335,3270.28 3390,3215.28 v2(3530,3215.28) ; CON19.1@2335,5315.28 2335,5120.28 3960,5120.28 4550,5120.28 4605,5170.28 CON22.9@4605,5220.28 ; v3@2745,5120.28 CON20.1@2745,5310.28 ; ISP2560.8@2995,4320.28 2995,4375.28 3045,4425.28 3500,4425.28 3530,4395.28 3530,3865.28 ; v2(3258.39,3065.89) 3282.3,3045.28 3375,3045.28 ; v2(3373.39,3065.89) 3375,3045.28 ; v2(3483.39,3065.89) 3485,3064.28 3485,3045.28 3375,3045.28 ; CON21.9@3705,5220.28 3865,5220.28 3960,5125.28 v3(3960,4905.28) ; v2@3890,3240.28 v2@4720,3240.28 ; 4289.07,3240.28 4289.07,3110.28 5325,3110.28 5325,2310.28 CON9.2@5225,2210.28
  Bottom Layer w50: 3528,3590.28 3850,3590.28 3975,3465.28 v2(4060,3465.28) ; ISP328.2@3720,4675.28 3720,4635.28 3755,4600.28 3910,4600.28 3960,4650.28 v3(3960,4720.28) ; v2(3830,3060.28) 3892.78,3060.28 v2(3893.39,3060.89) 4025,2910.28 4305,2910.28 4305,2480.28 v1(4103.39,2310.89)
  Bottom Layer w80: v2(3253.39,3865.89) 3530,3865.28 ; v2(3580,3070.28) 3530,3120.28 v2(3530,3215.28) 3530,3865.28 ; v2(3830,3305.28) 4465,3310.28 4615,3460.28 4615,4320.28 v3(4845,4550.28) v3(4845,4640.28) ; 3915,3865.28 3530,3865.28 ; v3@3957.5,4720.28 4357.5,4320.28 4612.5,4320.28
AREF328: C23.2 U3.20 | length 103
  Top Layer w20: C23.2@4160,4645.72 U3.20@4263,4645.68
AVCC328: C22.2 L3.1 U3.18 | length 410
  Top Layer w20: 4112.63,4708.68 U3.18@4263,4708.68 4195,4708.69 4163.4,4740.28 L3.1@4152.99,4740.28
  Top Layer w30: C22.2@4070,4645.72 4070,4670.28 4140,4740.28 L3.1@4152.99,4740.28
C4_2: C4.2 U1.8 | length 120.1
  Top Layer w25: C4.2@4112.99,2715.28 4113,2706.65 4172,2647.65 U1.8@4172,2619.65
C5_2: C5.2 R3.1 | length 81.3
  Top Layer w50: C5.2@3815,2354.02 R3.1@3815,2435.28
C15_2: C15.2 SW1.4 | length 470.2
  Top Layer w30: SW1.4@2117,2908.88 2117,2878.28 2265.63,2729.65 C15.2@2265.63,2500.28
CON10_1: CON10.1 U8.13 | length 1144.7
  Top Layer w25: U8.13@4829.7,3300.28 4985,3300.28 4985,2860.28 5115,2730.28 5115,2520.28 CON10.1@5225,2410.28
CON10_2: CON10.2 U8.14 | length 1018.1
  Top Layer w25: U8.14@4829.7,3350.28 5025,3350.28 5025,2890.28 5165,2750.28 5165,2670.28 CON10.2@5225,2610.28
CON11_1: CON11.1 U8.15 | length 915
  Top Layer w25: U8.15@4829.72,3400.28 5065,3400.28 5065,2930.28 5185,2810.28 CON11.1@5225,2810.28
CON11_2: CON11.2 U8.16 | length 800.1
  Top Layer w25: U8.16@4829.72,3450.28 5115,3450.28 5115,3070.28 5175,3010.28 CON11.2@5225,3010.28
CON12_1: CON12.1 U8.17 | length 515.4
  Top Layer w25: U8.17@4829.72,3500.28 v2(4925,3500.28)
  Bottom Layer w25: v2(4925,3500.28) 4935,3500.28 CON12.1@5225,3210.28
CON12_2: CON12.2 U8.18 | length 459.1
  Top Layer w25: U8.18@4829.72,3550.28 5095,3550.28 5225,3420.28 CON12.2@5225,3410.28
CON13_1: CON13.1 U7.11 | length 474
  Top Layer w25: U7.11@4829.72,3800.28 4890.01,3800.28 5080,3610.28 CON13.1@5225,3610.28
CON13_2: CON13.2 U7.12 | length 411.8
  Top Layer w25: U7.12@4829.72,3850.28 4910.01,3850.28 4950,3810.28 CON13.2@5225,3810.28
CON14_1: CON14.1 U7.13 | length 440.8
  Top Layer w25: U7.13@4829.72,3900.28 5114.99,3900.28 CON14.1@5225,4010.28
CON14_2: CON14.2 U7.14 | length 564.5
  Top Layer w25: U7.14@4829.72,3950.28 5070,3950.28 5070,3955.28 5100,3985.28 5100,4085.28 CON14.2@5225,4210.28
CON15_1: CON15.1 U7.15 | length 676.4
  Top Layer w25: U7.15@4829.72,4000.28 5004.99,4000.28 5035,4030.28 5035,4220.28 CON15.1@5225,4410.28
CON15_2: CON15.2 U7.16 | length 794.2
  Top Layer w25: U7.16@4829.7,4050.28 4950,4050.28 4985,4085.28 4985,4305.28 5225,4545.28 CON15.2@5225,4610.28
CON16_1: CON16.1 U7.17 | length 919.3
  Top Layer w25: U7.17@4829.77,4100.24 4904.95,4100.23 4925,4120.28 v1(4925,4125.28)
  Bottom Layer w25: v1(4925,4125.28) 4925,4330.28 5145,4550.28 5145,4735.28 CON16.1@5225,4810.28
CON16_2: CON16.2 U7.18 | length 1028
  Top Layer w25: U7.18@4829.7,4150.28 v1(4830,4205.28)
  Bottom Layer w25: v1(4830,4205.28) 4830,4300.28 5090,4560.28 5095,4900.28 CON16.2@5225,5010.28
CON20_2: CON20.2 U6.2 | length 432.1
  Top Layer w40: U6.2@2845,4878.23 CON20.2@2845,5310.28
D2_2: D1.1 D2.2 PLUG2.2 | length 404.9
  Top Layer w50: D1.1@4775,1923.36 D2.2@4875,1923.36 ; 4830,1923.35 4823.43,1916.78 4823.43,1670.28 4823.43,1695.92 PLUG2.2@4840,1712.49
D3_1: D3.1 D4.2 PLUG2.1 | length 401.7
  Top Layer w50: D4.2@4575,1923.36 D3.1@4675,1923.36 ; 4628.75,1923.35 4626.58,1921.18 PLUG2.1@4626.57,1670.28 4626.58,1699.07 PLUG2.1@4640,1712.49
D5_2: D5.2 JP3.2 JP4.1 | length 418.3
  Top Layer w50: JP4.1@4585,2260.28 4590,2265.28 JP3.2@4750,2265.28 4746.93,2268.35 D5.2@4746.93,2515.28
DCC-ACK: R28.2 U5.17 | length 5753.6
  Top Layer w12: U5.17@3571.3,4013.27 3571.3,4056.59 3585,4070.28 3585,4220.28
  Top Layer w30: v1(1595,4090.28) 1625,4120.28 1765,4120.28 2095,4450.28 3585,4450.28 3585,4220.28 ; v1(2425,2590.28) 2475.63,2539.65 R28.2@2475.63,2520.28
  Bottom Layer w30: 1595,3300.28 1595,2110.28 1795,2110.28 1915,2230.28 1915,2370.28 2135,2590.28 v1(2425,2590.28) ; 1595,3310.28 v1(1595,4090.28)
DCC-IN: OK3.6 R26.1 U5.44 | length 1555.2
  Top Layer w12: U5.44@3350.83,3595.95 3415.68,3595.96 v1(3420,3600.28)
  Top Layer w30: 2725,3090.28 2925.63,3090.28 R26.1@2925.63,3030.28 ; v1(2725,3487.78) 2725,3014.77 OK3.6@2730,3009.77
  Bottom Layer w12: v1(2725,3487.78) 2725,3490.28 2730,3495.28 3155,3495.28 3255.7,3596.28 3402.5,3595.28 3415,3595.28 v1(3420,3600.28)
DIR-X: CON21.3 U3.9 | length 1440.5
  Top Layer w12: CON21.3@3405,5220.28 3405,5120.28 3490,5035.28 4310,5035.28 v1(4390,4955.28) ; v1(4510,4955.28) 4545.4,4919.88 U3.9@4545.4,4802.78
  Bottom Layer w12: v1(4390,4955.28) v1(4510,4955.28)
DIR-Y: CON22.3 U3.10 | length 504
  Top Layer w12: CON22.3@4305,5220.28 4445,5080.28 4445,4920.28 4513.9,4851.38 U3.10@4513.9,4802.78
F1_1: F1.1 JP3.1 | length 188.4
  Top Layer w50: F1.1@4845.64,2451.86 4850,2447.5 JP3.1@4850,2265.28
F1_2: D2.1 D4.1 F1.2 | length 1090
  Top Layer w50: D4.1@4575,2057.21 4575,2160.28 4875,2160.28 ; D2.1@4875,2057.21 4875,2160.28 ; F1.2@4924.37,2648.71 4965,2648.68 4965,2220.28 4905,2160.28 4875,2160.28